# EAGLE board arbotixM_revB (EAGLE 5.12)
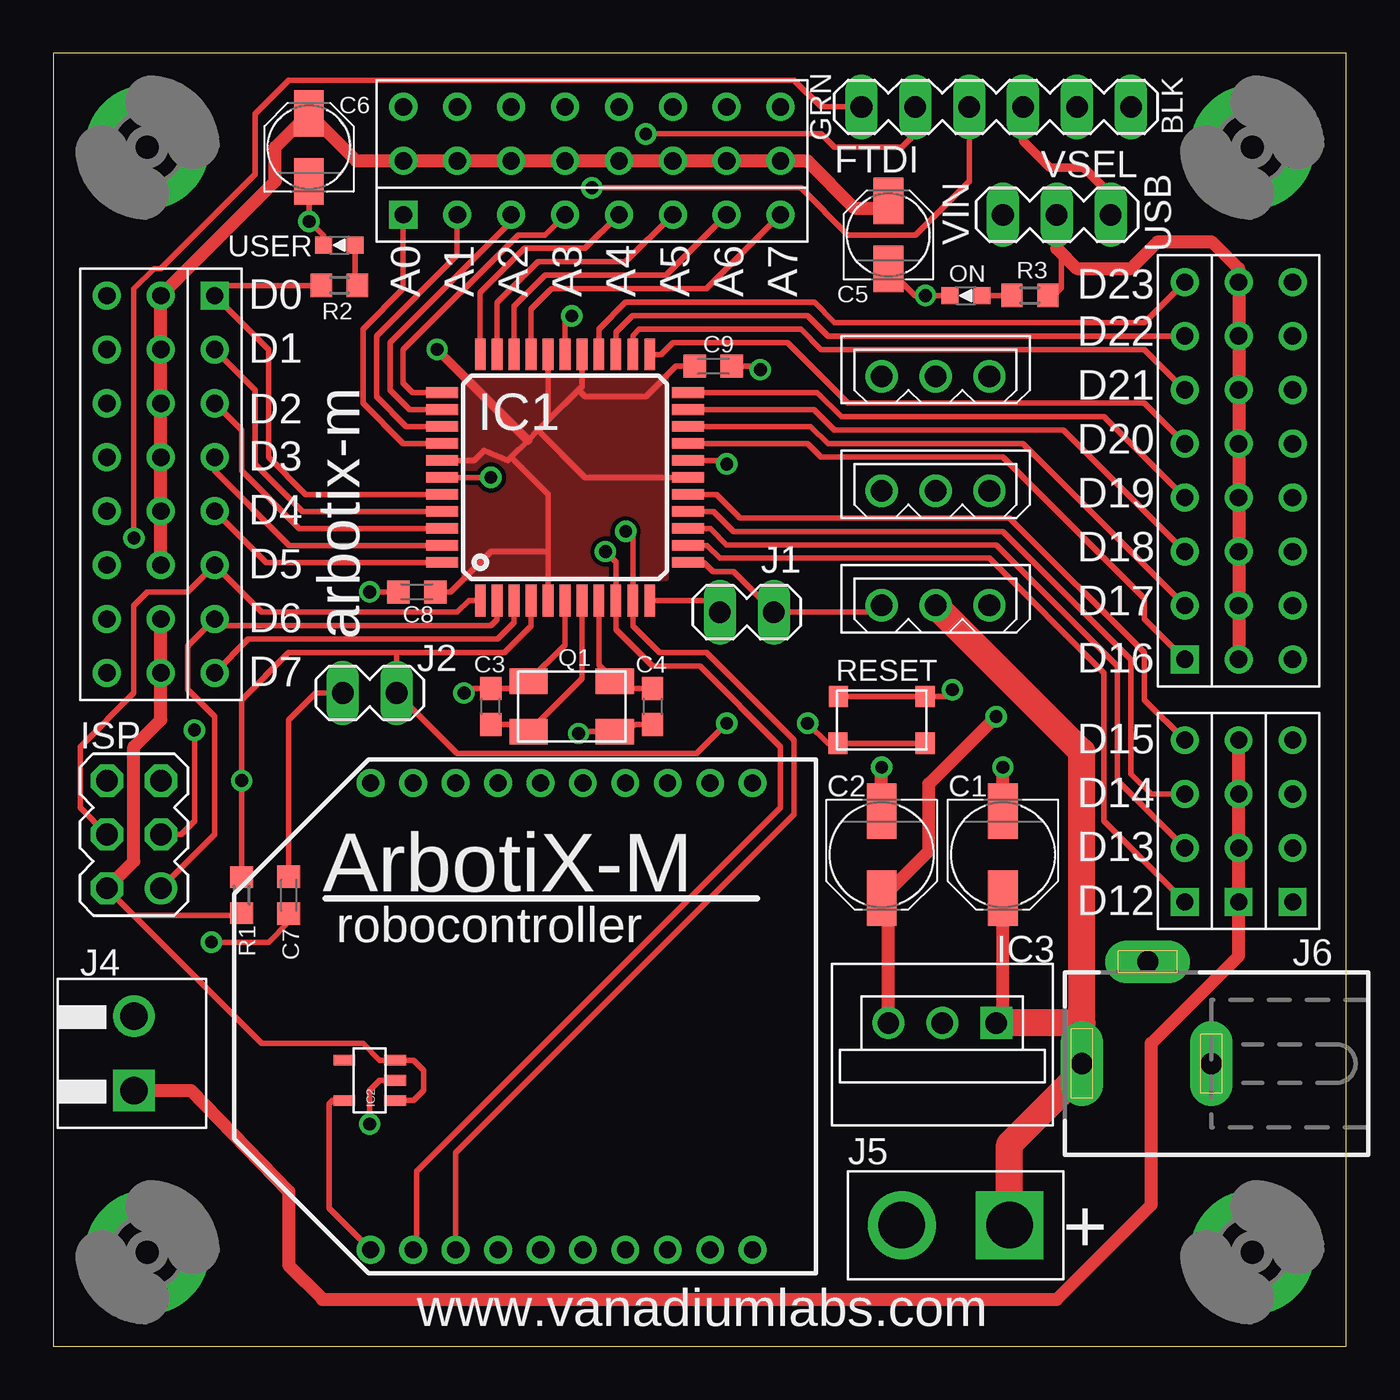
[diagram p0: board, top side]
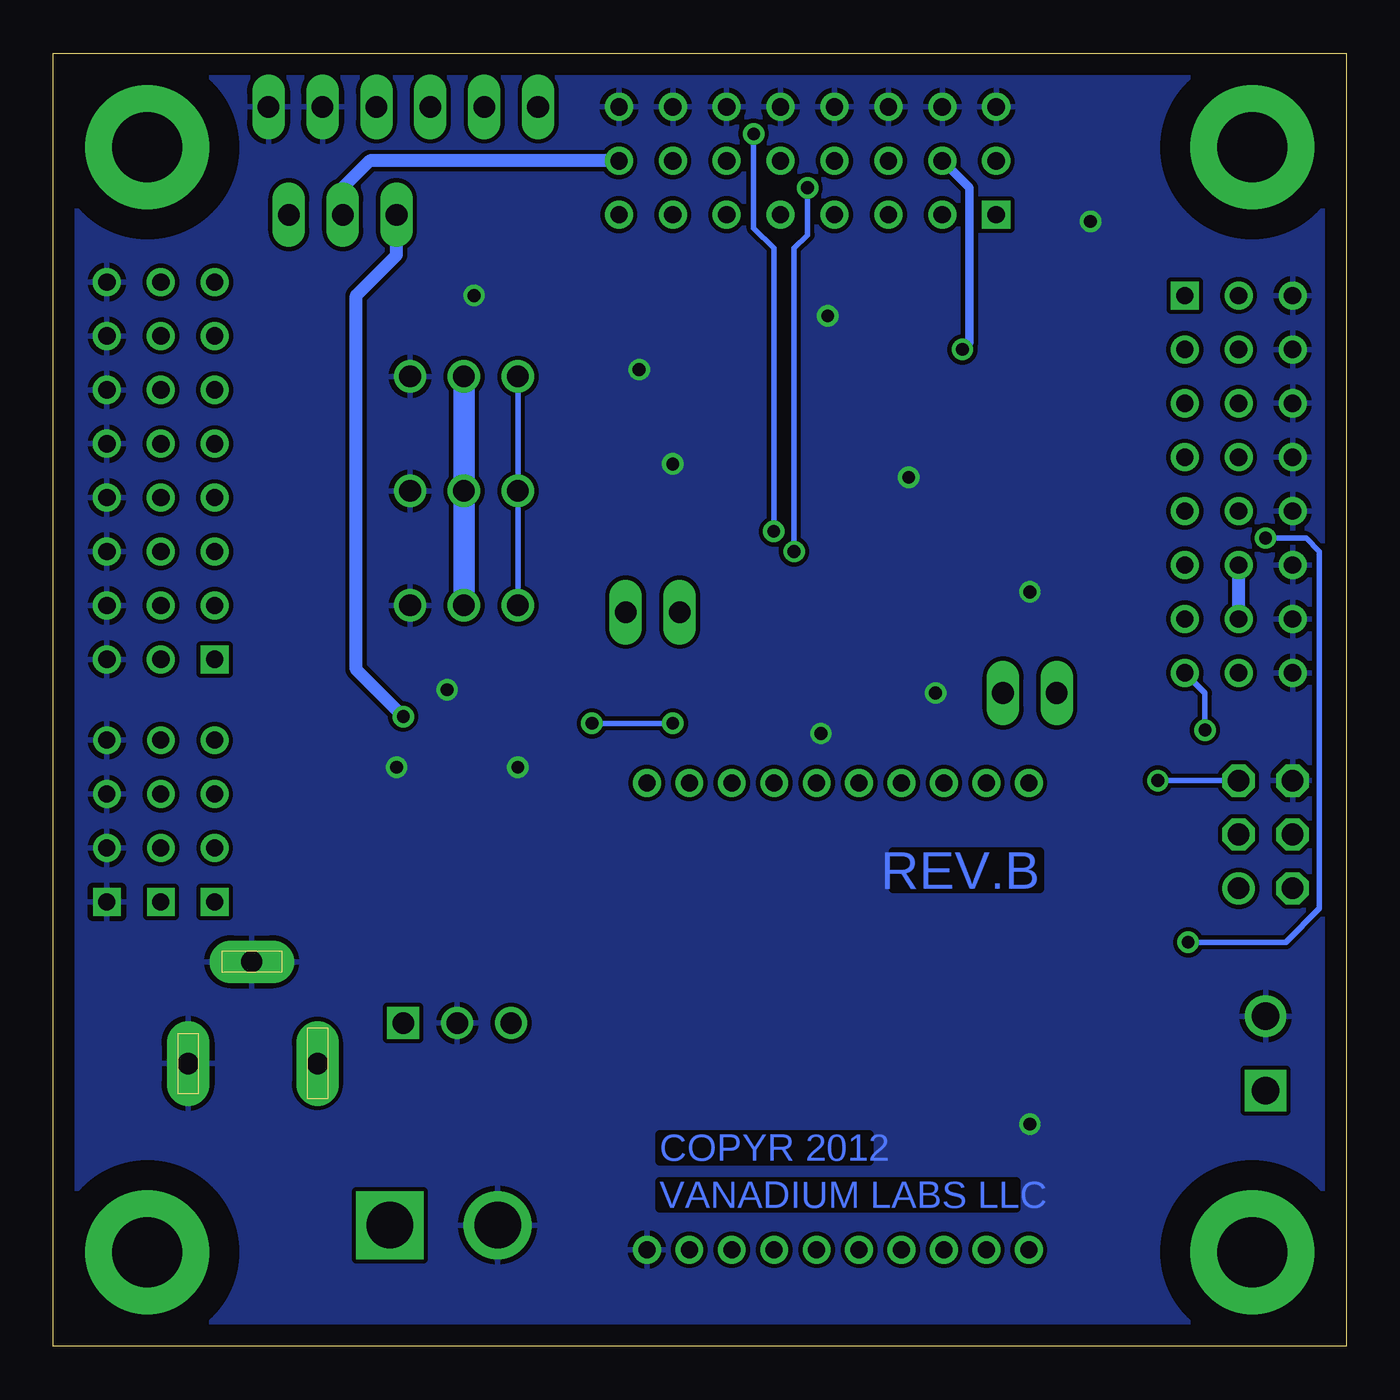
[diagram p1: board, bottom side, seen from below]

Size 60.96 x 60.96 mm. Coordinates in mm from the lower left corner, seen from the top.
Outline: 0,0 60.96,0 60.96,60.96 0,60.96 0,0
Copper layers (1*16): Top 0.035mm / dielectric 1.5mm / Bottom 0.035mm
Design rules "default *": minimum track width 8mil, minimum drill 20mil, track to track 8mil, track to pad 8mil, pad to pad 8mil, via to via 8mil, smd to smd 8mil, copper to edge 40mil, drill to drill 8mil, minimum pad ring 10mil, minimum via ring 8mil, stop-mask expansion 4mil, vias tented up to drill 24mil, thermal gap 10mil

## Footprints (pad centres in the part's own frame; a part is rotated, then mirrored left to right if it is on the bottom)
BIOLOID = drill 1.016 round: 1 0,0; 2 2.54,0; 3 5.08,0
PANASONIC_C = smd 2.6 x 1.4: + 2.05,0; - -2.05,0
C0603 = smd 1.1 x 1: 1 -0.85,0; 2 0.85,0
PANASONIC_B = smd 2.2 x 1.4: + 1.6,0; - -1.6,0
C0603' = smd 1.05 x 1.08: 1 -0.875,0; 2 0.875,0
MA06-1 = drill 1.016 long: 1 -6.35,0; 2 -3.81,0; 3 -1.27,0; 4 1.27,0; 5 3.81,0; 6 6.35,0
3,3-PAD = drill 3.3 pad 5.842 round: B3,3 0,0
TQFP44 = smd 1.5 x 0.5: 1 -5.8,4; 2 -5.8,3.2; 3 -5.8,2.4; 4 -5.8,1.6; 5 -5.8,0.8; 6 -5.8,0; 7 -5.8,-0.8; 8 -5.8,-1.6; 9 -5.8,-2.4; 10 -5.8,-3.2; 11 -5.8,-4; 23 5.8,-4; 24 5.8,-3.2; 25 5.8,-2.4; 26 5.8,-1.6; 27 5.8,-0.8; 28 5.8,0; 29 5.8,0.8; 30 5.8,1.6; 31 5.8,2.4; 32 5.8,3.2; 33 5.8,4 | smd 0.5 x 1.5: 12 -4,-5.8; 13 -3.2,-5.8; 14 -2.4,-5.8; 15 -1.6,-5.8; 16 -0.8,-5.8; 17 0,-5.8; 18 0.8,-5.8; 19 1.6,-5.8; 20 2.4,-5.8; 21 3.2,-5.8; 22 4,-5.8; 34 4,5.8; 35 3.2,5.8; 36 2.4,5.8; 37 1.6,5.8; 38 0.8,5.8; 39 0,5.8; 40 -0.8,5.8; 41 -1.6,5.8; 42 -2.4,5.8; 43 -3.2,5.8; 44 -4,5.8
SOT-23-5 = smd 0.508 x 1.016: 1 -0.95,-1.2; 2 0,-1.2; 3 0.95,-1.2; 4 0.95,1.2; 5 -0.95,1.2
OKI-78SR = drill 1 square: P$1 -2.54,0 | drill 1 round: P$2 0,0; P$3 2.54,0
MA03-2 = drill 1.016 round: 1 -2.54,-1.27 | drill 1.016 octagon: 2 -2.54,1.27; 3 0,-1.27; 4 0,1.27; 5 2.54,-1.27; 6 2.54,1.27
MA02-1 = drill 1.016 long: 1 -1.27,0; 2 1.27,0
MA03-1 = drill 1.016 long: 1 -2.54,0; 2 0,0; 3 2.54,0
TERM-3MM5-2 = drill 1.3 square: 1 0,0 | drill 1.3 round: 2 -3.5,0
POWER = drill 2.184 square: + 0,0 | drill 2.184 round: - 5.08,0
DCJ0202 = drill 1 pad 2 long: 1 0,3.1; 2 4.8,0; 3 0,-3
LED0603 = smd 0.8 x 0.8: A 0,-0.75; C 0,0.75
4LCC = smd 1.803 x 1.194: 1 -2.032,-1.194; 2 2.032,-1.194; 3 2.032,1.194; 4 -2.032,1.194
0603 = smd 1 x 1.1: 1 -0.85,0; 2 0.85,0
KMR2 = smd 0.9 x 1: 1 2.05,1.1; 2 2.05,-1.1; 3 -2.04,1.1; 4 -2.05,-1.1
1X8 = drill 0.813 square: P$1 0,0 | drill 0.813 round: P$2 2.54,0; P$3 5.08,0; P$4 7.62,0; P$5 10.16,0; P$6 12.7,0; P$7 15.24,0; P$8 17.78,0
1X4 = drill 0.8 square: 1 0,0 | drill 0.8 round: 2 2.54,0; 3 5.08,0; 4 7.62,0
2X8 = drill 0.813 round: P$1 0,0; P$2 2.54,0; P$3 5.08,0; P$4 7.62,0; P$5 10.16,0; P$6 12.7,0; P$7 15.24,0; P$8 17.78,0; P$9 0,2.54; P$10 2.54,2.54; P$11 5.08,2.54; P$12 7.62,2.54; P$13 10.16,2.54; P$14 12.7,2.54; P$15 15.24,2.54; P$16 17.78,2.54
XBEE = drill 0.8 pad 1.27 round: 1 -11,9; 2 -11,7; 3 -11,5; 4 -11,3; 5 -11,1; 6 -11,-1; 7 -11,-3; 8 -11,-5; 9 -11,-7; 10 -11,-9; 11 11,-9; 12 11,-7; 13 11,-5; 14 11,-3; 15 11,-1; 16 11,1; 17 11,3; 18 11,5; 19 11,7; 20 11,9

## Placement (x,y rotation side)
AX1  WM18887-ND  [BIOLOID]  44.13,45.72 180 top
AX2  WM18887-ND  [BIOLOID]  44.13,40.32 180 top
AX3  WM18887-ND  [BIOLOID]  44.13,34.92 180 top
C1  33uF  [PANASONIC_C]  44.77,23.18 270 top
C2  33uF  [PANASONIC_C]  39.05,23.18 270 top
C3  22pf  [C0603]  20.64,30.16 90 top
C4  22pf  [C0603]  28.26,30.16 270 top
C5  10uF  [PANASONIC_B]  39.37,52.39 90 top
C6  10uF  [PANASONIC_B]  12.06,56.52 90 top
C7  0.1uF  [C0603']  11.11,21.27 90 top
C8  0.1uF  [C0603']  17.14,35.56 180 top
C9  0.1uF  [C0603']  31.11,46.2 0 top
FTDI  [MA06-1]  44.45,58.42 180 top
H1  MOUNT-PAD-ROUND3.3  [3,3-PAD]  4.45,4.45 0 top
H2  MOUNT-PAD-ROUND3.3  [3,3-PAD]  4.45,56.52 0 top
H3  MOUNT-PAD-ROUND3.3  [3,3-PAD]  56.52,56.52 0 top
H4  MOUNT-PAD-ROUND3.3  [3,3-PAD]  56.52,4.45 0 top
IC1  MEGA644P-AU  [TQFP44]  24.13,40.96 90 top
IC2  MIC5205-3.3  [SOT-23-5]  14.92,12.54 90 top
IC3  OKI-78SR-5  [OKI-78SR]  41.91,15.24 180 top
ISP  [MA03-2]  3.81,24.13 90 top
J1  [MA02-1]  32.7,34.61 180 top
J2  [MA02-1]  14.92,30.8 0 top
J3  [MA03-1]  47.31,53.34 0 top
J4  1776275-2  [TERM-3MM5-2]  3.81,12.06 270 top
J5  POWER  [POWER]  45.09,5.71 180 top
J6  [DCJ0202]  51.59,13.34 90 top
ON  [LED0603]  43.02,49.53 90 top
Q1  16MHZ  [4LCC]  24.45,30.16 180 top
R1  10K  [0603]  8.89,21.27 270 top
R2  1K  [0603]  13.49,50.01 180 top
R3  1K  [0603]  46.04,49.53 0 top
RESET  KMR211GLFS  [KMR2]  39.05,29.53 0 top
U$1  HEADER8  [1X8]  7.62,49.53 270 top
U$2  HEADER8  [1X8]  53.34,32.38 90 top
U$3  HEADER4  [1X4]  53.34,20.95 90 top
U$4  HEADER4  [1X4]  55.88,20.95 90 top
U$5  HEADER8  [1X8]  16.51,53.34 0 top
U$6  HEADER4  [1X4]  58.42,20.95 90 top
U$8  HEADER16  [2X8]  5.08,31.75 90 top
U$9  HEADER16  [2X8]  16.51,55.88 0 top
U$10  HEADER16  [2X8]  55.88,50.16 270 top
USER  [LED0603]  13.49,51.91 90 top
XB1  XBEE  [XBEE]  23.97,15.56 90 top

## Library data of the parts
AX1-AX3 IC2 J5 U$1-U$6 U$8-U$10 = robots
C1 C2 C5-C9 ON USER = passive
C3 C4 = rcl
FTDI ISP J3 = con-lstb; OC_FARNELL: unknown; OC_NEWARK: unknown
H1-H4 = holes
IC1 = avr
IC3 J4 = power
J1 J2 = con-lstb
J6 = con-jack; OC_FARNELL: unknown; OC_NEWARK: unknown
Q1 RESET = stm32
R1 = passive; VALUE: 10k
R2 R3 = passive; VALUE: 1k
XB1 = maxstream; MPN: XBP24-Z7UIT-004; OC_FARNELL: 1751799; OC_NEWARK: 34R5507

## Nets
3V3: IC2.5 XB1.1
+5V: C5.+ C6.+ C8.1 C9.1 IC1.5 IC1.17 IC1.27 IC1.29 IC1.38 IC2.1 IC2.3 ISP.2 J3.2 R1.2 R3.2 U$8.P$1 U$8.P$2 U$8.P$3 U$8.P$4 U$8.P$5 U$8.P$6 U$8.P$7 U$8.P$8 U$9.P$1 U$9.P$2 U$9.P$3 U$9.P$4 U$9.P$5 U$9.P$6 U$9.P$7 U$9.P$8 U$10.P$1 U$10.P$2 U$10.P$3 U$10.P$4 U$10.P$5 U$10.P$6 U$10.P$7 U$10.P$8
+12V: AX1.2 AX2.2 AX3.2 C1.+ IC3.P$1 J5.+ J6.1
A0: IC1.37 U$5.P$1
A1: IC1.36 U$5.P$2
A2: IC1.35 U$5.P$3
A3: IC1.34 U$5.P$4
A4: IC1.33 U$5.P$5
A5: IC1.32 U$5.P$6
A6: IC1.31 U$5.P$7
A7: IC1.30 U$5.P$8
D0: IC1.40 R2.2 U$1.P$1
D1: IC1.41 U$1.P$2
D2: IC1.42 U$1.P$3
D3: IC1.43 U$1.P$4
D4: IC1.44 U$1.P$5
D12: IC1.13 U$3.1
D13: IC1.14 U$3.2
D14: IC1.15 U$3.3
D15: IC1.16 U$3.4
D18: IC1.21 U$2.P$3
D19: IC1.22 U$2.P$4
D20: IC1.23 U$2.P$5
D21: IC1.24 U$2.P$6
D22: IC1.25 U$2.P$7
D23: IC1.26 U$2.P$8
GND: AX1.1 AX2.1 AX3.1 C1.- C2.- C3.2 C4.2 C5.- C6.- C8.2 C9.2 FTDI.1 FTDI.2 IC1.6 IC1.18 IC1.28 IC1.39 IC2.2 IC3.P$2 ISP.6 J4.2 J5.- J6.2 J6.3 ON.C Q1.2 Q1.4 RESET.1 RESET.3 U$6.1 U$6.2 U$6.3 U$6.4 U$8.P$9 U$8.P$10 U$8.P$11 U$8.P$12 U$8.P$13 U$8.P$14 U$8.P$15 U$8.P$16 U$9.P$9 U$9.P$10 U$9.P$11 U$9.P$12 U$9.P$13 U$9.P$14 U$9.P$15 U$9.P$16 U$10.P$9 U$10.P$10 U$10.P$11 U$10.P$12 U$10.P$13 U$10.P$14 U$10.P$15 U$10.P$16 USER.C XB1.10
MISO: IC1.2 ISP.1 U$1.P$7
MOSI: IC1.1 ISP.4 U$1.P$6
N$1: C3.1 IC1.7 Q1.3
N$2: R2.1 USER.A
N$3: J4.1 U$4.1 U$4.2 U$4.3 U$4.4
N$4: C4.1 IC1.8 Q1.1
N$7: C7.2 J2.1
N$17: C2.+ IC3.P$3 J3.1
N$47: ON.A R3.1
RESET: IC1.4 ISP.5 J2.2 R1.1 RESET.2 RESET.4
RST: C7.1 FTDI.6
RX0: FTDI.4 IC1.9 XB1.2
RX1: IC1.11 J1.2
SCK: IC1.3 ISP.3 U$1.P$8
SCL: IC1.19 U$2.P$1
SDA: IC1.20 U$2.P$2
TX0: FTDI.5 IC1.10 XB1.3
TX1: AX1.3 AX2.3 AX3.3 IC1.12 J1.1
USB5V: FTDI.3 J3.3

## Tracks (layer width: path | path; a pad name or v marks a point on that pad's centre or on a via)
3V3
  Top 0.254: IC2.5 13.18,11.59 13.02,11.43 13.02,6.51 XB1.1
+5V  (via drill 0.6)
  Top 0.254: IC1.38 19.85,41.76 20.32,42.23 21.44,41.76 21.59,41.91 | 23.33,43.65 IC1.29 | 21.59,41.91 22.38,42.7 22.86,43.18 | 22.86,43.18 23.33,43.65 | IC1.27 24.93,45.25 24.77,45.09 | 23.33,43.65 24.77,45.09 | IC1.17 25.08,40.96 22.86,43.18 | 23.33,37.47 23.33,40.17 21.59,41.91 | 23.33,37.47 IC1.5 | IC2.1 16.99,11.59 17.46,12.06 17.46,13.02 16.99,13.49 IC2.3 15.4,13.49 14.61,14.29 9.84,14.29 3.81,20.32 | R1.2 8.47,20.42 8.57,20.32 3.81,20.32 | 3.81,20.32 ISP.2 | R3.2 47.15,49.53 47.52,49.9 47.52,51.54 47.31,51.75 | C8.1 18.73,35.56 20.64,37.47 23.33,37.47 | C9.1 29.37,46.2 27.94,44.77 25.08,44.77 24.77,45.09
  Top 0.406: v18.1,46.99 18.73,46.35 22.38,42.7
  Top 0.61: ISP.2 3.81,22.86 3.81,28.26 5.08,29.53 U$8.P$1 U$8.P$2 | U$8.P$3 U$8.P$4 U$8.P$5 U$8.P$6 U$8.P$7 U$8.P$8 10.48,54.93 10.48,56.53 C6.+ 12.06,58.1 14.29,55.88 U$9.P$1 U$9.P$2 U$9.P$3 U$9.P$4 U$9.P$5 U$9.P$6 U$9.P$7 U$9.P$8 35.56,55.88 37.78,53.66 39.36,53.66 C5.+ | U$10.P$8 U$10.P$7 U$10.P$6 U$10.P$5 U$10.P$4 U$10.P$3 U$10.P$2 U$10.P$1 55.88,50.8 54.61,52.07 52.07,52.07 50.8,50.8 48.26,50.8 47.31,51.75 J3.2
  Bottom 0.406: v18.1,46.99 17.78,47.31 17.78,54.61 U$9.P$2
  Bottom 0.61: U$8.P$2 U$8.P$3 | J3.2 47.31,54.61 46.04,55.88 U$9.P$8
  pour Top: 19.37,45.72 28.89,45.72 28.89,36.2 19.37,36.2
+12V
  Top 0.61: IC3.P$1 44.77,15.41 C1.+
  Top 1.27: J5.+ 45.09,9.53 48.49,12.93 J6.1 48.49,15.24 | 48.49,15.24 48.49,28.02 AX3.2 | 48.49,15.24 IC3.P$1
  Bottom 1.016: AX1.2 AX2.2 AX3.2
A0
  Top 0.254: IC1.37 16.5,42.56 14.61,44.45 14.61,47.94 16.51,49.85 U$5.P$1
A1
  Top 0.254: IC1.36 16.65,43.36 15.24,44.77 15.24,47.62 19.05,51.44 U$5.P$2
A2
  Top 0.254: IC1.35 16.8,44.16 15.88,45.09 15.88,47.31 21.59,53.02 U$5.P$3
A3
  Top 0.254: IC1.34 16.95,44.96 16.51,45.4 16.51,46.99 21.91,52.39 23.18,52.39 U$5.P$4
A4
  Top 0.254: IC1.33 20.13,49.66 22.23,51.75 25.08,51.75 U$5.P$5
A5
  Top 0.254: IC1.32 20.93,49.19 22.86,51.12 26.99,51.12 U$5.P$6
A6
  Top 0.254: IC1.31 21.73,49.03 23.18,50.48 28.89,50.48 U$5.P$7
A7
  Top 0.254: IC1.30 22.53,48.88 23.5,49.85 30.8,49.85 U$5.P$8
D0
  Top 0.254: IC1.40 11.91,40.16 10.16,41.91 10.16,46.99 U$1.P$1 8.1,50.01 R2.2
D1
  Top 0.254: U$1.P$2 9.53,45.09 9.53,41.59 11.76,39.36 IC1.41
D2
  Top 0.254: IC1.42 11.61,38.56 8.89,41.27 8.89,43.18 U$1.P$3
D3
  Top 0.254: IC1.43 11.14,37.76 7.62,41.27 U$1.P$4
D4
  Top 0.254: IC1.44 10.03,36.96 U$1.P$5
D12
  Top 0.254: IC1.13 30.82,37.76 31.43,37.15 44.13,37.15 49.53,31.75 49.53,24.77 U$3.1
D13
  Top 0.254: IC1.14 30.98,38.56 31.75,37.78 44.45,37.78 50.16,32.07 50.16,26.67 U$3.2
D14
  Top 0.254: IC1.15 31.13,39.36 32.07,38.42 44.77,38.42 50.8,32.38 50.8,26.99 51.75,26.04 U$3.3
D15
  Top 0.254: IC1.16 31.28,40.16 32.38,39.05 45.09,39.05 51.44,32.7 51.44,30.48 U$3.4
D18
  Top 0.254: U$2.P$3 47.62,43.18 36.83,43.18 35.85,44.16 IC1.21
D19
  Top 0.254: IC1.22 36.01,44.96 37.15,43.81 49.53,43.81 U$2.P$4
D20
  Top 0.254: IC1.23 28.66,46.76 29.21,47.31 34.61,47.31 37.47,44.45 51.44,44.45 U$2.P$5
D21
  Top 0.254: IC1.24 27.33,47.65 27.62,47.94 35.24,47.94 36.2,46.99 51.44,46.99 U$2.P$6
D22
  Top 0.254: IC1.25 26.53,47.8 27.3,48.58 35.56,48.58 36.51,47.62 U$2.P$7
D23
  Top 0.254: IC1.26 25.73,47.95 26.99,49.21 35.88,49.21 36.83,48.26 51.44,48.26 U$2.P$8
GND  (via drill 0.6)
  Top 0.254: IC1.6 24.13,33.07 Q1.2 22.39,31.01 C3.2 19.58,31.01 v19.37,30.8 | 27.14,29 27.3,29.21 27.41,29.31 C4.2 | 27.14,29 Q1.4 | 27.14,29 24.87,29 v24.77,28.89 | IC1.39 v20.64,40.96 | IC1.28 24.13,48.26 v24.45,48.58 | IC2.2 15.4,12.54 14.92,12.06 v14.92,10.48 | C5.- 40.63,49.52 v41.12,49.53 ON.C | v14.92,35.56 C8.2 | IC1.18 31.59,41.76 v31.75,41.59 | C9.2 33.18,46.2 v33.34,46.04 | RESET.3 RESET.1 42.06,30.63 v42.39,30.96 | C6.- v12.06,53.02 12.74,52.34 USER.C
  Top 0.61: C2.- v39.05,27.3 | C1.- v44.77,27.3
  pour Bottom: 0,60.96 0,0 60.96,0 60.96,60.96
MISO
  Top 0.254: IC1.2 20.93,34.27 20.64,33.97 7.94,33.97 U$1.P$7 6.35,33.02 6.35,30.96 7.62,29.69 7.62,24.13 ISP.1
MOSI
  Top 0.254: IC1.1 19.6,35.16 19.05,34.61 9.84,34.61 U$1.P$6 6.35,35.56 4.45,35.56 3.81,34.92 3.81,30.8 1.27,28.26 1.27,25.4 ISP.4
N$1
  Top 0.254: IC1.7 24.93,31.48 Q1.3 22.71,29.31 C3.1
N$2
  Top 0.254: USER.A 14.24,50.11 R2.1
N$3
  Top 0.61: U$4.4 U$4.3 U$4.2 U$4.1 55.88,18.41 51.75,14.29 51.75,6.67 47.31,2.22 12.7,2.22 11.11,3.81 11.11,7.3 6.51,12.06 J4.1
N$4
  Top 0.254: IC1.8 25.73,32.11 Q1.1 27.14,31.01 C4.1
N$7
  Top 0.254: C7.2 11.11,29.53 12.38,30.8 J2.1
N$17  (via drill 0.6)
  Top 0.61: IC3.P$3 39.37,20.81 C2.+ 41.27,23.35 41.27,26.51 v44.45,29.69
  Bottom 0.61: J3.1 44.77,51.44 46.67,49.53 46.67,31.91 v44.45,29.69
N$47
  Top 0.254: R3.1 ON.A
RESET  (via drill 0.6)
  Top 0.254: IC1.4 22.53,33.96 21.27,32.7 16.19,32.7 | 16.19,32.7 J2.2 19.05,27.94 30.32,27.94 v31.75,29.37 | 16.19,32.7 11.11,32.7 8.89,30.48 v8.89,26.67 R1.1 | RESET.2 RESET.4 36.52,28.43 v35.56,29.37
  Bottom 0.254: v8.89,26.67 ISP.5 | v31.75,29.37 v35.56,29.37
RST  (via drill 0.6)
  Top 0.254: FTDI.6 36.2,58.42 34.92,59.69 11.11,59.69 9.53,58.1 9.53,55.24 5.08,50.8 4.76,50.8 3.81,49.85 v3.81,38.1 | C7.1 11.11,20 10.16,19.05 v7.46,19.05
  Bottom 0.254: v7.46,19.05 2.86,19.05 1.27,20.64 1.27,37.47 1.91,38.1 v3.81,38.1
RX0  (via drill 0.6)
  Top 0.254: v26.04,37.47 26.53,36.97 IC1.9 26.53,33.8 28.26,32.07 30.48,32.07 34.29,28.26 34.29,25.4 17.14,8.26 17.14,4.7 XB1.2 | FTDI.4 43.18,54.93 40.64,52.39 37.47,52.39 35.24,54.61 v25.4,54.61
  Bottom 0.254: v26.04,37.47 26.04,51.75 25.4,52.39 v25.4,54.61
RX1
  Top 0.254: IC1.11 30.88,35.16 J1.2
SCK  (via drill 0.6)
  Top 0.254: IC1.3 21.73,34.11 20.95,33.34 9.21,33.34 U$1.P$8 | ISP.3 6.03,24.13 6.67,24.77 v6.67,29.05 6.67,28.57
  Bottom 0.254: v6.67,29.05 6.67,30.8 U$1.P$8
SCL
  Top 0.254: U$2.P$1 51.44,34.29 51.44,35.24 44.77,41.91 36.2,41.91 35.55,42.56 IC1.19
SDA
  Top 0.254: U$2.P$2 45.72,42.55 36.51,42.55 35.7,43.36 IC1.20
TX0  (via drill 0.6)
  Top 0.254: v26.99,38.42 27.33,38.08 IC1.10 27.33,33.95 28.57,32.7 30.8,32.7 34.92,28.57 34.92,25.08 18.97,9.13 XB1.3 | FTDI.5 40.64,57.15 40.01,56.52 36.83,56.52 36.2,57.15 v27.94,57.15
  Bottom 0.254: v26.99,38.42 26.99,51.75 27.94,52.7 v27.94,57.15
TX1
  Top 0.254: IC1.12 30.67,36.96 31.11,36.51 32.07,36.51 J1.1 38.73,34.61 AX3.3 38.89,34.77
  Bottom 0.254: AX1.3 AX2.3 AX3.3
USB5V
  Top 0.406: J3.3 49.85,54.29 48.58,55.56 46.99,55.56 45.72,56.83 FTDI.3

## Text on the board
Bottom: REV.B | COPYR 2012 | VANADIUM LABS LLC
tPlace: J4 | www.vanadiumlabs.com
tNames: BLK | GRN | VSEL | A0 | A1 | A2 | A3 | A4 | A5 | A6 | A7 | VIN | USB | D23 | D0 | D22 | D1 | D21 | D2 | D20 | D3 | D19 | D4 | D18 | D5 | D17 | D6 | arbotix-m | D16 | D7 | D15 | D14 | D13 | D12 | ArbotiX-M | robocontroller | +